# EAGLE board mainboard (EAGLE 6.5.0)
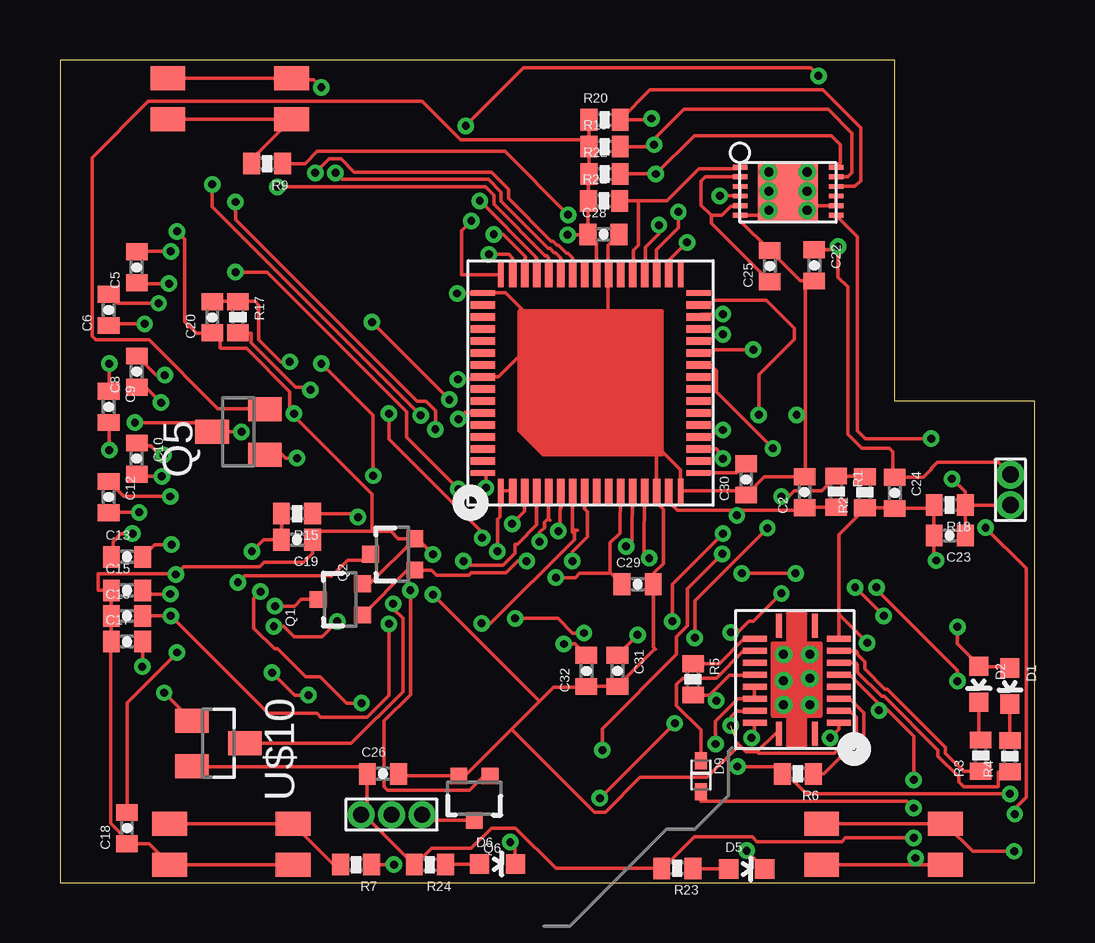
[diagram p0: board, top side]
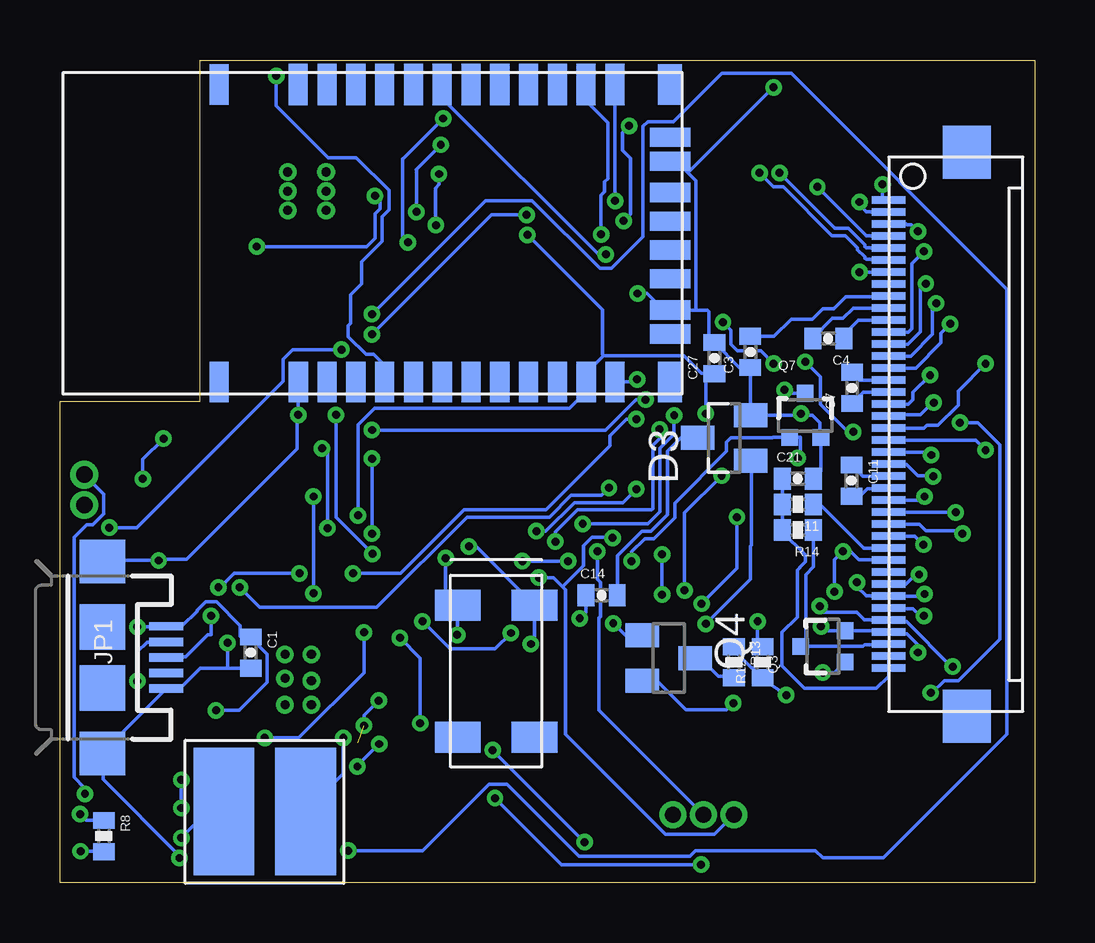
[diagram p1: board, bottom side, seen from below]

Size 40.64 x 34.29 mm. Coordinates in mm from the lower left corner, seen from the top.
Outline: 0,0 40.64,0 40.64,20.07 34.8,20.07 34.8,34.29 0,34.29 0,0
Copper layers (1*16): Top 0.035mm / dielectric 1.5mm / Bottom 0.035mm
Design rules "default *": minimum track width 6mil, minimum drill 13mil, track to track 6mil, track to pad 6mil, pad to pad 6mil, via to via 6mil, smd to smd 6mil, copper to edge 10mil, drill to drill 8mil, minimum pad ring 7mil, minimum via ring 7mil, stop-mask expansion 4mil, vias tented up to drill 0mil, thermal gap 10mil

## Footprints (pad centres in the part's own frame; a part is rotated, then mirrored left to right if it is on the bottom)
0402-CAP = smd 0.7 x 0.9: 1 -0.65,0; 2 0.65,0
LED-0603 = smd 0.8 x 0.8: A 0,-0.75; C 0,0.75
SOT23 = smd 1 x 1.4: 1 -0.95,-1.1; 2 0.95,-1.1; 3 0,1.1
SOD523 = smd 0.7 x 0.5: A 0.7,0; C -0.6,0
USB-MICROB = smd 0.35 x 1.4: D+ 0,2.65; D- -0.65,2.65; GND 1.3,2.65; ID 0.65,2.65; VBUS -1.3,2.65 | smd 1.8 x 1.9: MT1 -4,0; MT2 4,0 | smd 1.9 x 1.9: P$1 -1.27,0; P$2 1.27,0
ASPI_0428S-100M-T = smd 5.309 x 2.54: 1 0,0; 2 0,3.404
SOT323 = smd 0.7 x 0.7: 1 -0.65,-0.925; 2 0.65,-0.925; 3 0,0.925
0402-RES = smd 0.7 x 0.9: 1 -0.65,0; 2 0.65,0
VQFN_RGC_64PIN = smd 1.016 x 0.229: 1 0,8.25; 16 0,0.75; 33 9,0.75; 48 9,8.25 | smd 1.016 x 0.305: 2 0,7.75; 3 0,7.25; 4 0,6.75; 5 0,6.25; 6 0,5.75; 7 0,5.25; 8 0,4.75; 9 0,4.25; 10 0,3.75; 11 0,3.25; 12 0,2.75; 13 0,2.25; 14 0,1.75; 15 0,1.25; 34 9,1.25; 35 9,1.75; 36 9,2.25; 37 9,2.75; 38 9,3.25; 39 9,3.75; 40 9,4.25; 41 9,4.75; 42 9,5.25; 43 9,5.75; 44 9,6.25; 45 9,6.75; 46 9,7.25; 47 9,7.75 | smd 0.229 x 1.016: 17 0.75,0; 32 8.25,0; 49 8.25,9; 64 0.75,9 | smd 0.305 x 1.016: 18 1.25,0; 19 1.75,0; 20 2.25,0; 21 2.75,0; 22 3.25,0; 23 3.75,0; 24 4.25,0; 25 4.75,0; 26 5.25,0; 27 5.75,0; 28 6.25,0; 29 6.75,0; 30 7.25,0; 31 7.75,0; 50 7.75,9; 51 7.25,9; 52 6.75,9; 53 6.25,9; 54 5.75,9; 55 5.25,9; 56 4.75,9; 57 4.25,9; 58 3.75,9; 59 3.25,9; 60 2.75,9; 61 2.25,9; 62 1.75,9; 63 1.25,9
RN-42 = smd 1.7 x 0.8: 1 0.5,16; 2 0.5,14.8; 3 0.5,13.6; 4 0.5,12.4; 5 0.5,11.2; 6 0.5,10; 7 0.5,8.8; 8 0.5,7.6; 9 0.5,6.4; 10 0.5,5.2; 11 0.5,4; 12 0.5,2.8; 13 12.9,2.8; 14 12.9,4; 15 12.9,5.2; 16 12.9,6.4; 17 12.9,7.6; 18 12.9,8.8; 19 12.9,10; 20 12.9,11.2; 21 12.9,12.4; 22 12.9,13.6; 23 12.9,14.8; 24 12.9,16; P$35 0.5,19.3; P$36 12.9,19.3 | smd 0.8 x 1.7: 28 9.7,0.5; 29 3.5,0.5; 30 10.7,0.5; 31 8.4,0.5; 32 7.2,0.5; 33 6,0.5; 34 4.8,0.5; 35 2.5,0.5 | smd 1.7 x 1: P$33 0.5,0.5; P$34 12.9,0.5
VQFN_RHL_20PIN = smd 1 x 0.25: 1 0,1; 10 4.5,1; 11 4.5,2.5; 20 0,2.5 | smd 0.25 x 1: 2 0.45,0; 3 0.95,0; 4 1.45,0; 5 1.95,0; 6 2.45,0; 7 2.95,0; 8 3.45,0; 9 3.95,0; 12 3.95,3.5; 13 3.45,3.5; 14 2.95,3.5; 15 2.45,3.5; 16 1.95,3.5; 17 1.45,3.5; 18 0.95,3.5; 19 0.45,3.5 | drill 0.381: P$21 1.2,2.3; P$22 1.2,1.2; P$23 2.3,1.2; P$24 2.2,2.3; P$25 3.3,2.3; P$26 3.3,1.2
EVQ-PUK02K = smd 1.45 x 1: 1 5.15,1.7; 2 5.15,0; 3 0,1.7; 4 0,0
FH12-40S-0.5SH = smd 0.31 x 1.4: 1 0,0; 2 0.5,0; 3 1,0; 4 1.5,0; 5 2,0; 6 2.5,0; 7 3,0; 8 3.5,0; 9 4,0; 10 4.5,0; 11 5,0; 12 5.5,0; 13 6,0; 14 6.5,0; 15 7,0; 16 7.5,0; 17 8,0; 18 8.5,0; 19 9,0; 20 9.5,0; 21 10,0; 22 10.5,0; 23 11,0; 24 11.5,0; 25 12,0; 26 12.5,0; 27 13,0; 28 13.5,0; 29 14,0; 30 14.5,0; 31 15,0; 32 15.5,0; 33 16,0; 34 16.5,0; 35 17,0; 36 17.5,0; 37 18,0; 38 18.5,0; 39 19,0; 40 19.5,0 | smd 2.2 x 2: G@0 -2,3.25; G@1 21.5,3.25
SON_DRZ_12PIN = smd 0.2 x 0.6: 1 0.2,0; 2 0.6,0; 3 1,0; 4 1.4,0; 5 1.8,0; 6 2.2,0; 7 2.2,4; 8 1.8,4; 9 1.4,4; 10 1,4; 11 0.6,4; 12 0.2,4 | smd 2.5 x 2.5: 13 1.25,2 | drill 0.381: P$15 0.4,2.8; P$16 1.2,2.8; P$17 2,2.8; P$18 2,1.2; P$19 1.2,1.2; P$20 0.4,1.2
HEADER_2PIN_50MIL = drill 0.686 pad 1.016: 1 1.27,1.27; 2 1.27,2.54
HEADER_3PIN_50MIL = drill 0.66 pad 1.016: 1 1.27,1.27; 2 1.27,2.54; 3 1.27,3.81
ECS-327-12.5-17X-C-TR = smd 1.3 x 1.9: 1 1.25,0.3; 2 6.75,0.3; 3 6.75,3.5; 4 1.25,3.5

## Placement (x,y rotation side)
C1  0.1uF  [0402-CAP]  32.69,9.6 270 bottom
C2  10uF  [0402-CAP]  31.04,16.28 90 top
C3  [0402-CAP]  11.86,22.12 90 bottom
C4  [0402-CAP]  8.61,22.68 180 bottom
C5  [0402-CAP]  3.2,25.65 90 top
C6  [0402-CAP]  2.03,23.88 90 top
C7  [0402-CAP]  7.62,20.62 90 bottom
C8  [0402-CAP]  3.2,21.31 90 top
C9  [0402-CAP]  2.03,19.84 270 top
C10  [0402-CAP]  3.2,17.68 270 top
C11  [0402-CAP]  7.65,16.76 270 bottom
C12  [0402-CAP]  2.03,16.08 270 top
C13  [0402-CAP]  2.79,13.59 0 top
C14  [0402-CAP]  18.06,11.99 0 bottom
C15  [0402-CAP]  2.79,12.19 0 top
C16  [0402-CAP]  2.79,11.13 0 top
C17  [0402-CAP]  2.79,10.06 0 top
C18  [0402-CAP]  2.79,2.29 90 top
C19  [0402-CAP]  9.88,14.3 180 top
C20  [0402-CAP]  6.35,23.57 90 top
C21  [0402-CAP]  9.88,16.84 0 bottom
C22  0.1uF  [0402-CAP]  31.45,25.73 270 top
C23  0.1uF  [0402-CAP]  37.08,14.48 180 top
C24  0.1uF  [0402-CAP]  34.8,16.26 270 top
C25  0.47uF  [0402-CAP]  29.59,25.7 90 top
C26  [0402-CAP]  13.46,4.55 0 top
C27  0.1uF  [0402-CAP]  13.36,21.87 90 bottom
C28  0.1uF  [0402-CAP]  22.66,27.03 0 top
C29  0.1uF  [0402-CAP]  24.08,12.45 0 top
C30  0.47uF  [0402-CAP]  28.6,16.81 90 top
C31  12.5pF  [0402-CAP]  23.24,8.84 270 top
C32  12.5pF  [0402-CAP]  21.95,8.84 90 top
D1  BLUE  [LED-0603]  39.6,8.2 180 top
D2  BLUE  [LED-0603]  38.3,8.28 180 top
D3  BAT54S  [SOT23]  12.95,18.54 90 bottom
D5  BLUE  [LED-0603]  28.63,0.58 270 top
D6  BLUE  [LED-0603]  18.24,0.79 270 top
D9  [SOD523]  26.72,4.5 270 top
JP1  USB-MICROB  [USB-MICROB]  38.86,9.4 270 bottom
L1  10uH  [ASPI_0428S-100M-T]  30.4,2.97 90 bottom
Q1  MOSFET-NCHANNEL2N7002PW  [SOT323]  11.68,11.81 90 top
Q2  MOSFET-NCHANNEL2N7002PW  [SOT323]  13.87,13.69 90 top
Q3  MOSFET-NCHANNEL2N7002PW  [SOT323]  8.84,9.86 90 bottom
Q4  BSS84  [SOT23]  15.27,9.37 270 bottom
Q5  BSS84  [SOT23]  7.44,18.8 90 top
Q6  MOSFET-NCHANNEL2N7002PW  [SOT323]  17.27,3.53 180 top
Q7  MOSFET-NCHANNEL2N7002PW  [SOT323]  9.58,19.48 0 bottom
R1  56K  [0402-RES]  32.36,16.31 270 top
R2  10K  [0402-RES]  33.55,16.28 90 top
R3  1.5K  [0402-RES]  38.38,5.31 90 top
R4  1.5K  [0402-RES]  39.6,5.28 90 top
R5  1.6K  [0402-RES]  26.39,8.48 270 top
R6  10K  [0402-RES]  30.76,4.55 180 top
R7  10K  [0402-RES]  12.34,0.76 180 top
R8  10K  [0402-RES]  38.81,1.96 270 bottom
R9  10K  [0402-RES]  8.64,29.97 180 top
R11  [0402-RES]  9.88,15.77 180 bottom
R12  [0402-RES]  11.35,9.19 90 bottom
R13  [0402-RES]  12.55,9.19 270 bottom
R14  [0402-RES]  9.88,14.71 180 bottom
R15  [0402-RES]  9.88,15.39 180 top
R17  [0402-RES]  7.42,23.57 270 top
R18  0.01  [0402-RES]  37.08,15.75 180 top
R19  10K  [0402-RES]  22.71,30.68 0 top
R20  10K  [0402-RES]  22.71,31.8 0 top
R21  1.8M  [0402-RES]  22.68,28.42 0 top
R22  10K  [0402-RES]  22.71,29.54 0 top
R23  80  [0402-RES]  25.73,0.61 180 top
R24  80  [0402-RES]  15.42,0.76 180 top
U$1  MSP430F5528  [VQFN_RGC_64PIN]  26.62,16.33 90 top
U$2  RN-42  [RN-42]  14.71,20.37 90 bottom
U$3  BQ25010  [VQFN_RHL_20PIN]  32.46,6.22 90 top
U$4  RA_TAC_BUTTON"EVQPUK"  [EVQ-PUK02K]  4.57,0.76 0 top
U$5  RA_TAC_BUTTON"EVQPUK"  [EVQ-PUK02K]  31.75,0.76 0 top
U$6  RA_TAC_BUTTON"EVQPUK"  [EVQ-PUK02K]  9.65,33.53 180 top
U$8  FH12-40S-0.5SH  [FH12-40S-0.5SH]  6.1,28.45 270 bottom
U$9  BQ27410  [SON_DRZ_12PIN]  28.35,30.02 270 top
U$10  DMG2305UX  [SOT23]  6.6,5.82 270 top
U$11  HEADER_2PIN_50MIL  [HEADER_2PIN_50MIL]  40.89,18.29 180 top
U$12  HEADER_3PIN_50MIL  [HEADER_3PIN_50MIL]  16.36,1.57 90 top
X1  CRYSTAL"32.768"  [ECS-327-12.5-17X-C-TR]  24.36,12.83 270 bottom

## Library data of the parts
C1-C32 = SparkFun-Capacitors
D1 D2 D5 D6 = SparkFun-LED; PROD_ID: DIO-08575
D3 = diode
D9 = SparkFun-DiscreteSemi
JP1 = SparkFun-Connectors; PROD_ID: CONN-09505
L1 U$1-U$3 U$8-U$12 X1 = TuansLib
Q1-Q3 Q6 Q7 = SparkFun-DiscreteSemi; PROD_ID: TRANS-11151
Q4 Q5 = transistor-small-signal
R1-R9 R11-R15 R17-R24 = SparkFun-Passives
U$4-U$6 = TuansLib; PART#: EVQ-PUK02K

## Nets
BATT_PWR: C22.1 C24.1 R6.2 U$3.16 U$3.17 U$9.3 U$9.4 U$11.1
BORDER: Q3.3 R14.1 U$8.38
BT_BAUD: U$1.48 U$2.4
BT_CONN: U$1.47 U$2.19
BTN_0: R7.1 U$1.26
BTN_1: R8.1 U$1.27
BTN_2: R9.1 U$1.28
BTN_3: U$1.29
EPD_BORDER: Q4.1 U$1.7
EPD_BUSY: U$1.5 U$8.2
EPD_CS: U$1.3 U$8.1
EPD_DISCHARGE: Q1.1 Q2.1 U$1.8
EPD_PANEL: Q5.1 Q7.1 U$1.4
EPD_PWM: C14.1 U$1.19
EPD_RST: U$1.6 U$8.7
GND: C1.2 C2.2 C3.1 C15.1 C16.1 C17.1 C18.1 C19.1 C20.1 C21.2 C22.2 C23.2 C24.2 C25.2 C26.2 C27.2 C28.2 C29.2 C30.1 C31.2 C32.1 D3.2 JP1.GND JP1.MT1 JP1.MT2 Q1.2 Q2.2 Q6.2 Q7.2 R2.1 R5.2 R18.2 U$1.14 U$1.16 U$1.39 U$1.49 U$1.56 U$2.1 U$2.12 U$2.28 U$2.29 U$3.3 U$3.9 U$3.15 U$3.18 U$3.20 U$4.2 U$4.4 U$5.2 U$5.4 U$6.2 U$6.4 U$8.3 U$8.33 U$9.6 U$9.8 U$9.9 U$9.13 U$9.P$15 U$9.P$16 U$9.P$17 U$9.P$18 U$9.P$19 U$9.P$20
LED_0: D5.C U$1.30
LED_1: D6.C U$1.31
LED_2: U$1.32
LED_3: U$1.33
N$1: R5.1 U$3.12
N$2: D1.C R4.2
N$3: D9.C U$3.13
N$4: D2.C R3.2
N$5: R1.1 R2.2 U$3.2
N$6: L1.1 U$3.19
N$7: C30.2 U$1.17
N$8: Q4.3 R13.2
N$9: C14.2 D3.3
N$10: R4.1 U$3.7
N$11: R3.1 U$3.8
N$12: R6.1 U$3.4
N$13: R7.2 U$4.1 U$4.3
N$14: R8.2 U$5.1 U$5.3
N$15: R9.2 U$6.1 U$6.3
N$19: Q6.3 U$12.1
N$26: C4.2 U$8.10
N$27: C4.1 U$8.11
N$28: C5.2 U$8.12
N$29: C5.1 U$8.13
N$30: C6.2 U$8.14
N$31: C6.1 U$8.15
N$32: C7.2 U$8.16
N$33: C7.1 U$8.17
N$34: C8.2 U$8.18
N$35: C8.1 U$8.19
N$36: C9.1 U$8.20
N$37: C9.2 U$8.21
N$38: C10.1 U$8.22
N$39: C10.2 U$8.23
N$40: C11.1 U$8.24
N$41: C11.2 U$8.25
N$42: C12.1 U$8.26
N$43: C12.2 U$8.27
N$44: C13.1 U$8.28
N$45: C13.2 U$8.29
N$46: C3.2 U$8.9
N$47: R15.1 U$10.3
N$48: D5.A R23.1
N$49: Q3.1 R12.1 R13.1
N$50: C20.2 Q5.3 R17.1 U$10.1
N$51: D6.A R24.1
N$52: Q7.3 R17.2
PM_BIN: R21.2 U$1.37 U$9.1
PM_GPOUT: R22.2 U$1.36 U$9.12
PM_SCL: R19.2 U$1.35 U$9.11
PM_SDA: R20.2 U$1.34 U$9.10
PM_SRP: C23.1 R18.1 U$9.7 U$11.2
SENSOR_DATA: U$1.1 U$1.2 U$12.2
SENSOR_EN: Q6.1 U$1.20
SPI_CLK: U$1.44 U$8.4
SPI_MISO: U$1.43 U$8.6
SPI_MOSI: U$1.42 U$8.5
SPYBY_RST: JP1.D+ U$1.64
SPYBY_TEST: JP1.D- U$1.59
UART_RX: U$1.46 U$2.14
UART_TX: U$1.45 U$2.13
VCC: C2.1 C26.1 C27.1 C28.1 C29.1 L1.2 Q5.2 R1.2 R19.1 R20.1 R21.1 R22.1 R23.2 R24.2 U$1.11 U$1.15 U$1.40 U$2.11 U$10.2 U$12.3
VCC_R: C25.1 U$9.2 U$9.5
VCC_T: C19.2 Q4.2 R15.2 U$8.31 U$8.32
VCOM: C21.1 R11.2 R14.2 U$8.39 U$8.40
VCOM_DRIVER: R11.1 U$8.30
VDH: C17.2 Q1.3 U$8.36
VDL: C18.2 Q3.2 R12.2 U$8.37
VGH: C15.2 Q2.3 U$8.34
VGL: C16.2 D3.1 U$8.35
VUSB: C1.1 D1.A D2.A D9.A JP1.VBUS U$3.6
XIN: C32.2 U$1.12 X1.4
XOUT: C31.1 U$1.13 X1.1

## Tracks (layer width: path | path; a pad name or v marks a point on that pad's centre or on a via)
BATT_PWR  (via drill 0.33, 0.33 pad 0.51)
  Top 0.152: U$11.1 39.12,17.53 36.58,17.53 36.32,17.27 36.32,17.25 35.98,16.91 C24.1 34.72,16.98 34.72,17.96 34.57,18.11 33.43,18.11 32.84,18.69 32.84,24.84 32.44,25.25 v32.44,26.52 32.3,26.38 C22.1 | U$9.3 U$9.4 v27.51,28.63 | U$3.16 28.96,8.15 28.96,7.7 U$3.17 28.91,7.67 28.27,7.67 27.33,6.73 v27.33,5.79 | v39.6,3.71 31.11,3.71 30.28,4.55 R6.2 30.1,4.6 30.1,4.85 v28.25,4.85
  Bottom 0.152: v27.51,28.63 27.3,28.42 27.3,28.09 27.51,27.89 27.51,26.87 27.86,26.52 v32.44,26.52 | v39.6,3.71 39.6,3.94 40.06,4.39 40.06,14.4 39.52,14.94 39.27,14.94 38.81,15.39 38.81,16.2 U$11.1 | v27.33,5.79 28.25,4.88 v28.25,4.85
BORDER
  Bottom 0.152: U$8.38 6.11,9.93 7.09,9.93 7.16,9.86 Q3.3 9.55,10.07 9.55,12.85 9.23,13.17 R14.1
BT_BAUD  (via drill 0.33 pad 0.51)
  Top 0.152: U$1.48 18.39,25.35 18.36,25.38 18.34,25.35 16.74,25.35 16.74,27.18 v17.14,27.58 | v16.92,31.55 19.33,33.96 31.29,33.96 v31.62,33.63
  Bottom 0.152: v17.14,27.58 16.87,27.86 16.87,30.2 17.2,30.53 17.2,31.27 v16.92,31.55 | v31.62,33.63 31.62,32.38 29.46,30.23 28.3,30.23 26.92,28.85 26.92,28.04 27.2,27.76 27.2,26.75 28.07,25.88 28.07,24.97 28.52,24.51 28.52,23.32 28.63,23.22 28.63,22.76 27.89,22.02 27.56,22.02 27.1,21.57 U$2.4
BT_CONN  (via drill 0.33 pad 0.51)
  Top 0.152: v17.88,26.19 18.72,26.19 18.87,26.04 18.87,25.35 U$1.47
  Bottom 0.152: v17.88,26.19 18.19,26.19 24.54,32.54 24.69,32.54 24.71,32.56 24.71,33.25 U$2.19
BTN_0  (via drill 0.33)
  Top 0.152: v13.92,0.76 R7.1 | v25.63,6.66 v22.5,3.53 | v26.47,10.21 26.47,11.76 v29.49,14.78 | v29.72,18.11 27.36,20.47 27.36,21.34 27.13,21.57 26.62,21.57 U$1.26
  Bottom 0.152: v13.92,0.76 19.74,0.76 v22.5,3.53 | v25.63,6.66 25.63,9.37 v26.47,10.21 | v29.49,14.78 29.49,17.88 v29.72,18.11
BTN_1  (via drill 0.33)
  Top 0.152: v39.8,2.87 39.8,3.1 40.28,3.58 40.28,13.11 v38.58,14.81 | v28.91,22.23 27.25,22.23 27.13,22.1 26.62,22.1 U$1.27
  Bottom 0.152: v39.8,2.87 39.55,2.62 R8.1 | v38.58,14.81 37.44,14.81 31.34,20.9 31.34,21.82 30.94,22.23 v28.91,22.23
BTN_2  (via drill 0.33)
  Top 0.152: R9.1 10.21,29.97 10.72,30.48 18.54,30.48 v21.18,27.84 | v27.64,22.86 27.38,22.86 27.13,22.61 26.62,22.61 U$1.28
  Bottom 0.152: v21.18,27.84 22.66,27.84 v27.64,22.86
EPD_BORDER  (via drill 0.33 pad 0.51)
  Top 0.152: 21.36,14.61 21.36,14.71 | 21.36,14.71 U$1.7 | 21.44,14.71 21.36,14.71 | 21.44,14.71 21.57,14.71 | 21.44,14.71 21.44,14.3 17.96,10.82 v17.58,10.82
  Bottom 0.152: v17.58,10.82 17.07,10.31 16.38,10.31 Q4.1
EPD_BUSY  (via drill 0.33 pad 0.51)
  Top 0.152: U$1.5 20.37,15.16 | 20.37,15.16 20.42,15.11 | v19.99,14.22 19.99,14.61 20.19,14.81 20.19,15.04 20.3,15.14 20.37,15.16 | v15.65,18.9 15.65,19.68 15.27,20.07 14.88,20.07 7.32,27.64 v7.32,28.37
  Bottom 0.152: 7.44,28.5 7.44,28.37 7.39,28.32 | 7.39,28.32 7.04,27.96 6.83,27.96 6.81,27.94 U$8.2 | v19.99,14.22 19.99,14.63 19.07,15.54 15.98,15.54 15.93,15.6 15.93,18.24 15.65,18.52 v15.65,18.9 | v7.32,28.37 7.34,28.37 7.39,28.32
EPD_CS  (via drill 0.33 pad 0.51)
  Top 0.152: U$1.3 19.37,15.48 v18.85,14.96 | v6.35,29.11 6.35,28.17 v15.04,19.48
  Bottom 0.152: U$8.1 6.35,28.45 v6.35,29.11 6.35,29.23 | v15.04,19.48 15.04,18.69 15.62,18.11 15.62,15.47 16.13,14.96 v18.85,14.96
EPD_DISCHARGE  (via drill 0.33 pad 0.51)
  Top 0.152: Q1.1 14.49,13.04 Q2.1 14.86,13.03 15.49,13.03 15.7,12.83 17.04,12.83 17.14,12.93 18.59,12.93 19.07,13.41 v19.46,13.41 | U$1.8 21.87,15.6 22,15.47 22,14.43 21.36,13.79 v21.36,13.41 | U$1.8
  Bottom 0.152: v19.46,13.41 v21.36,13.41
EPD_PANEL  (via drill 0.33 pad 0.51)
  Top 0.152: v9.88,17.7 9.4,17.7 9.25,17.86 8.56,17.86 Q5.1 | U$1.4 19.87,14.92 19.07,14.12 18.97,14.12 18.97,13.74 18.47,13.23 16.99,13.23 v16.82,13.41
  Bottom 0.152: v9.88,17.7 9.78,17.8 9.78,18.57 10.21,18.57 Q7.1 10.29,18.57 10.92,18.57 10.95,18.54 12.68,18.54 12.85,18.36 12.85,17.98 15.01,15.82 15.01,15.21 15.88,14.35 16.26,14.35 16.82,13.79 v16.82,13.41
EPD_PWM  (via drill 0.33 pad 0.51)
  Top 0.152: U$1.19 27.36,18.09 27.46,17.98 27.46,17.8 27.51,17.8 v27.64,17.68 | v27.64,14.55 25.53,12.45 v25.53,10.9 | v21.84,10.41 21.36,10.41 20.75,11.02 v18.97,11.02
  Bottom 0.152: v27.64,14.55 v27.64,17.68 | v25.53,10.9 24.38,9.75 22.5,9.75 v21.84,10.41 | v18.97,11.02 18.72,11.28 C14.1
EPD_RST  (via drill 0.33 pad 0.51)
  Top 0.152: U$1.6 20.88,15.62 20.85,15.6 20.85,14.73 v20.78,14.66 | v16.61,16.41 14.45,18.57 14.45,19.63 8.64,25.45 v7.32,25.45
  Bottom 0.152: v20.78,14.66 20.4,14.66 19.2,15.85 17.17,15.85 v16.61,16.41 | v7.32,25.45 U$8.7
GND  (via drill 0.33, 0.33 pad 0.51)  (1 unrouted)
  Top 0.152: U$6.2 U$6.4 9.7,33.48 10.57,33.48 v10.9,33.15 | Q1.2 12.91,12.46 Q2.2 | v36.52,13.44 36.43,13.53 C23.2 R18.2 36.29,15.61 C24.2 34.77,15.63 R2.1 33.53,15.57 32.46,14.5 32.46,11.15 | U$9.P$20 U$9.P$19 | U$9.P$19 U$9.P$18 29.35,27.82 U$9.6 28.35,27.6 C25.2 29.64,26.31 30.86,25.09 31.45,25.09 C22.2 31.06,25.04 31.06,19.51 | U$9.P$19 U$9.P$16 | U$9.13 31.1,28.77 U$9.P$16 | U$9.P$16 U$9.P$15 | U$9.P$16 U$9.P$17 31.35,28.22 U$9.8 U$9.9 | 22.85,25.35 U$1.39 | 22.85,25.35 22.85,26.57 C28.2 | 13.01,14.66 13.79,14.66 14.1,14.35 14.71,14.35 Q2.2 | 13.01,14.66 10.54,14.66 10.54,14.35 C19.1 10.53,13.73 10.16,13.36 8.51,13.36 8.33,13.18 5.16,13.18 v4.83,12.85 4.83,12.88 1.6,12.88 1.6,12.19 C15.1 C16.1 C17.1 2.11,10.01 2.11,2.49 2.77,1.83 2.77,1.7 C18.1 2.79,1.63 3.71,1.63 U$4.4 U$4.2 | v4.88,27.15 5.21,26.82 5.21,23.39 5.69,22.91 C20.1 6.4,22.91 6.68,22.91 6.68,22.3 6.71,22.28 7.77,22.28 9.58,20.47 9.58,19.66 9.65,19.66 v9.75,19.56 9.7,19.51 13.01,16.2 13.01,14.66 | 22.85,25.35 22.85,23.23 22.81,23.19 22.71,23.29 19.86,23.29 | 19.86,23.29 18.57,24.58 U$1.49 17.55,24.56 v16.56,24.56 | 19.86,23.29 19.86,22.66 18.29,21.08 U$1.56 17.55,21.06 17.48,20.98 v16.59,20.98 | R5.2 26.44,7.82 27.08,7.82 27.1,7.85 | U$3.15 27.91,8.66 27.1,7.85 | C26.2 14.12,4.55 14.2,4.47 Q6.2 16.69,4.47 16.89,4.47 18.82,6.4 | U$5.2 35.66,0.76 | 35.66,0.76 U$5.4 | v35.66,1.04 35.66,0.76 | 32.46,11.15 U$3.9 | 31.06,19.51 31.06,16.99 C2.2 31.04,16.92 29.36,16.92 28.65,16.2 C30.1 28.43,16.33 U$1.16 25.87,17.21 25.04,18.03 24.87,17.86 U$1.14 24.92,16.28 24.92,15.8 25.15,15.57 25.15,13.31 24.77,12.93 24.77,12.5 C29.2 24.73,9.81 24.82,9.73 24.78,9.73 C31.2 C32.1 21.89,8.15 20.57,8.15 19.99,7.57
  Top 0.152: 31.06,19.51 v30.71,19.51 | U$3.20 29.82,6.22 29.06,5.46 | 29.06,5.46 28.6,5.46 28.32,5.74 | 28.22,5.84 28.32,5.74 | U$3.3 32.94,7.16 33.2,6.91 33.2,6.33 32.28,5.41 29.11,5.41 29.06,5.46 | 19.99,7.57 18.82,6.4 | v33.66,10.01 32.51,11.15 32.46,11.15 | 28.32,5.74 26.98,4.39 24.18,4.39 22.73,2.95 22.28,2.95 18.82,6.4 | v15.54,12.01 19.99,7.57 | v15.54,13.69 14.86,14.38 Q2.2 | v27.96,6.55 27.96,6.93 28.19,7.16 U$3.18 | 27.1,7.85 v27.36,7.59
  Bottom 0.152: JP1.MT1 38.82,13.44 v36.52,13.44 36.47,13.49 35.36,13.49 30.76,18.09 30.76,19.46 v30.71,19.51 30.71,20.85 U$2.1 | C21.2 8.93,17.14 Q7.2 8.97,18.6 8.97,19.18 9.28,19.49 9.75,19.49 | 9.75,19.49 D3.2 C3.1 12.31,21.47 C27.2 13.59,22.75 13.59,23.8 13.66,23.87 14.12,23.87 | 14.12,23.87 U$2.29 15.27,23.9 15.52,23.9 16.18,24.56 v16.56,24.56 | v4.88,27.15 5.16,27.43 5.36,27.43 5.38,27.46 U$8.3 | v9.75,19.56 9.75,19.49 | v4.83,12.85 4.98,12.85 5.38,12.45 5.39,12.45 U$8.33 | v16.59,20.98 16.69,20.88 U$2.12 | 14.45,29.59 14.12,29.26 14.12,23.87 | 14.45,29.59 14.91,30.05 15.19,30.05 U$2.28 | 14.45,29.59 v10.9,33.15 | v35.66,1.04 35.66,1.14 38.84,4.32 38.84,5.33 JP1.MT2 38.86,5.45 JP1.GND 36.14,8.13 35.61,8.13 34.8,8.94 33.66,8.94 | 33.66,8.94 C1.2 | v33.66,10.01 33.66,8.94 | v15.54,13.69 v15.54,12.01 | v27.96,6.55 27.96,6.99 v27.36,7.59
  cutout Bottom: 0.25,34.04 0.3,0.25 40.36,0.25 40.36,19.81 34.42,19.81 34.42,34.04
LED_0  (via drill 0.33)
  Top 0.152: v28.63,1.35 28.63,1.32 29.36,0.58 D5.C | v27.64,23.7 26.72,23.7 26.62,23.6 U$1.30
  Bottom 0.152: v28.63,1.35 25.53,1.35 22.76,4.12 22,4.12 19,1.12 14.38,1.12 14.15,1.35 9.14,1.35 8.84,1.04 6.33,1.04 1.17,6.2 1.17,24.74 10.16,33.73 13.06,33.73 15.06,31.73 16.13,31.73 16.33,31.52 16.33,26.92 17.65,25.6 18.14,25.6 20.95,28.42 22.91,28.42 v27.64,23.7
LED_1  (via drill 0.33)
  Top 0.152: v18.77,1.7 18.97,1.5 18.97,0.79 D6.C | v22.61,5.54 22.61,6.43 25.7,9.53 25.7,10.26 26.16,10.72 26.16,12.27 v27.61,13.72 | v29.13,19.51 29.13,21.18 30.61,22.66 30.61,23.11 29.44,24.28 27.28,24.28 27.1,24.11 26.62,24.11 U$1.31
  Bottom 0.152: v22.61,5.54 v18.77,1.7 | v27.61,13.72 29.13,15.24 v29.13,19.51
N$1
  Top 0.152: R5.1 26.39,9.14 27.48,9.14 28.5,10.16 U$3.12
N$2
  Top 0.152: R4.2 D1.C
N$3
  Top 0.152: D9.C 26.72,6.38 25.7,7.39 25.7,8.28 25.96,8.53 27.36,8.53 28.47,9.65 28.96,9.65 U$3.13
N$4
  Top 0.152: D2.C 38.3,6.04 R3.2
N$5  (via drill 0.33)
  Top 0.152: R2.2 33.55,16.94 32.36,16.94 R1.1 32.31,16.89 31.75,16.33 30.61,16.33 30.38,16.1 v30.07,16.1 | U$3.2 32.46,6.4 v32.11,6.04 | v27.96,10.44 28.27,10.44 28.73,10.9 28.91,10.9 v30.07,12.06
  Bottom 0.152: v32.11,6.04 30.68,6.04 27.96,8.76 v27.96,10.44 | v30.07,16.1 v30.07,12.06
N$6  (via drill 0.33)
  Top 0.152: v28.83,6.04 28.96,6.17 28.96,6.66 U$3.19
  Bottom 0.152: v28.83,6.04 28.83,4.55 L1.1
N$7
  Top 0.152: C30.2 28.22,17.08 U$1.17
N$8
  Bottom 0.152: Q4.3 13.95,9.37 13.18,8.61 12.61,8.61 R13.2
N$9
  Bottom 0.152: D3.3 14.76,18.54 15.32,17.98 15.32,15.34 16,14.66 16.38,14.66 17.4,13.64 C14.2
N$10
  Top 0.152: R4.1 39.12,4.62 39.12,4.04 39.09,4.01 37.67,4.01 37.47,4.22 37.47,4.42 36.6,5.28 36.6,5.54 34.37,7.77 34.27,7.77 33.25,8.79 33.25,9.09 33.17,9.17 U$3.7
N$11
  Top 0.152: R3.1 38.38,4.65 37.67,4.65 36.91,5.41 36.91,5.66 34.49,8.08 34.39,8.08 33.55,8.91 33.55,9.22 33.25,9.53 33.25,9.6 33.17,9.68 U$3.8
N$12
  Top 0.152: R6.1 31.85,4.55 33.5,6.2 33.5,7.09 32.92,7.67 U$3.4
N$13
  Top 0.152: R7.2 11.4,0.76 9.73,2.44 U$4.1 9.65,2.46 U$4.3
N$14  (via drill 0.33)
  Top 0.152: U$5.3 36.83,2.46 U$5.1 36.96,2.41 38.05,1.32 v39.78,1.32
  Bottom 0.152: v39.78,1.32 R8.2
N$15
  Top 0.152: U$6.1 U$6.3 7.99,30.16 R9.2
N$19
  Top 0.152: U$12.1 15.32,2.62 Q6.3
N$26
  Bottom 0.152: U$8.10 7.57,23.95 8,23.52 8.43,23.52 9.26,22.69 C4.2
N$27
  Bottom 0.152: U$8.11 7.37,23.44 7.96,22.85 C4.1
N$28  (via drill 0.33 pad 0.51)
  Top 0.152: v4.62,26.31 3.21,26.31 C5.2
  Bottom 0.152: U$8.12 5.27,22.95 5.13,23.09 5.13,25.81 v4.62,26.31
N$29  (via drill 0.33 pad 0.51)
  Top 0.152: v4.55,24.97 3.24,24.97 C5.1
  Bottom 0.152: U$8.13 5.29,22.45 4.78,22.96 4.78,24.74 v4.55,24.97
N$30  (via drill 0.33 pad 0.51)
  Top 0.152: v4.12,24.16 2.4,24.16 C6.2
  Bottom 0.152: U$8.14 5.18,21.95 4.27,22.86 4.27,24 v4.12,24.16
N$31  (via drill 0.33 pad 0.51)
  Top 0.152: v3.53,23.29 2.1,23.29 C6.1
  Bottom 0.152: U$8.15 4.97,21.45 3.91,22.5 3.91,22.91 v3.53,23.29
N$32
  Bottom 0.152: U$8.16 7.29,20.95 C7.2
N$33
  Bottom 0.152: U$8.17 7.15,20.45 C7.1
N$34  (via drill 0.33 pad 0.51)
  Top 0.152: v4.37,21.16 4,21.16 C8.2
  Bottom 0.152: U$8.18 5.27,19.95 5.08,20.14 5.08,20.45 v4.37,21.16
N$35  (via drill 0.33 pad 0.51)
  Top 0.152: C8.1 3.57,20.66 v4.22,20.02
  Bottom 0.152: v4.22,20.02 4.27,20.02 4.78,19.51 6.04,19.51 U$8.19
N$36  (via drill 0.33 pad 0.51)
  Top 0.152: v2.06,21.64 2.06,20.51 C9.1
  Bottom 0.152: U$8.20 4.62,18.95 4.5,19.07 4.04,19.07 3.2,19.91 3.2,20.5 v2.06,21.64
N$37  (via drill 0.33 pad 0.51)
  Top 0.152: v2.06,18.03 2.06,19.16 C9.2
  Bottom 0.152: U$8.21 2.47,18.45 v2.06,18.03
N$38  (via drill 0.33 pad 0.51)
  Top 0.152: C10.1 3.32,18.21 3.79,18.21 4.17,17.83 v4.32,17.83 4.14,17.83
  Bottom 0.152: v4.32,17.83 4.43,17.95 U$8.22
N$39  (via drill 0.33 pad 0.51)
  Top 0.152: C10.2 3.29,16.94 v4.24,16.94
  Bottom 0.152: v4.24,16.94 4.27,16.97 4.88,16.97 5.36,17.45 U$8.23
N$40
  Bottom 0.152: U$8.24 7.18,16.95 C11.1
N$41
  Bottom 0.152: U$8.25 6.11,16.43 6.99,16.43 7.3,16.11 C11.2
N$42  (via drill 0.33 pad 0.51)
  Top 0.152: C12.1 2.66,16.1 v4.6,16.1
  Bottom 0.152: v4.6,16.1 4.75,15.95 U$8.26
N$43  (via drill 0.33 pad 0.51)
  Top 0.152: C12.2 2.05,15.44 v3.3,15.44
  Bottom 0.152: v3.3,15.44 v3.31,15.45 U$8.27
N$44  (via drill 0.33 pad 0.51)
  Top 0.152: C13.1 2.21,13.65 2.21,14.22 2.54,14.55 v3.02,14.55
  Bottom 0.152: v3.02,14.55 3.15,14.68 4.55,14.68 4.81,14.95 U$8.28
N$45  (via drill 0.33 pad 0.51)
  Top 0.152: C13.2 3.95,14.1 v4.65,14.1
  Bottom 0.152: v4.65,14.1 5,14.45 U$8.29
N$46
  Bottom 0.152: U$8.9 6.11,24.43 7.87,24.43 8.38,23.93 8.84,23.93 9.27,23.5 10.16,23.5 10.88,22.77 C3.2
N$47  (via drill 0.33)
  Top 0.152: R15.1 12.27,15.39 v12.42,15.24 | v13.89,11.63 13.89,11.43 14.3,11.02 14.3,7.98 12.14,5.82 U$10.3
  Bottom 0.152: v12.42,15.24 12.42,13.11 v13.89,11.63
N$48
  Top 0.152: D5.A 26.42,0.58 R23.1
N$49  (via drill 0.33 pad 0.51)
  Top 0.152: v10.36,7.82 9.78,7.82 v8.84,8.76
  Bottom 0.152: R13.1 12.55,9.7 11.81,8.97 11.78,8.97 R12.1 11.35,8.51 v10.36,7.82 | Q3.1 8.36,8.76 v8.84,8.76
N$50  (via drill 0.33, 0.33 pad 0.51)
  Top 0.152: C20.2 6.35,24.23 7.42,24.23 R17.1 7.47,24.23 8.13,24.23 8.28,24.08 8.28,22.63 9.2,21.72 v9.58,21.72 | v7.57,18.8 Q5.3 6.27,18.82 5.92,19.18 v3.12,19.18 | v4.34,7.92 5.49,6.78 U$10.1
  Bottom 0.152: v7.57,18.8 7.8,18.8 8.94,19.94 8.94,21.08 v9.58,21.72 | v4.34,7.92 4.29,7.92 3.79,8.43 3.2,8.43 1.47,10.16 1.47,18.26 2.39,19.18 v3.12,19.18
N$51
  Top 0.152: D6.A 16.1,0.79 R24.1
N$52  (via drill 0.33 pad 0.51)
  Top 0.152: R17.2 7.98,22.91 7.98,22.5 9.83,20.65 10.34,20.65 v10.44,20.55
  Bottom 0.152: v10.44,20.55 10.29,20.4 9.58,20.4 Q7.3
PM_BIN
  Top 0.152: U$9.1 28.29,29.77 26.64,29.77 25.3,28.42 24.11,28.42 | 24.11,28.42 R21.2 | U$1.37 23.9,25.36 23.9,26.36 24.11,26.57 24.11,28.42
PM_GPOUT  (via drill 0.33 pad 0.51)
  Top 0.152: U$9.12 32.54,30.01 32.54,30.76 32.16,31.14 26.44,31.14 v24.84,29.54 R22.2 | U$1.36 24.41,25.37 24.41,26.49 24.97,27.05 v24.97,27.41
  Bottom 0.152: v24.97,27.41 24.97,27.66 24.99,27.69 24.99,28.96 24.84,29.11 v24.84,29.54
PM_SCL  (via drill 0.33 pad 0.51)
  Top 0.152: U$9.11 32.85,29.42 33.02,29.59 33.02,31.24 32.03,32.23 26.01,32.23 24.65,30.87 | 24.65,30.87 24.46,30.68 R19.2 | 24.65,30.87 v24.77,30.76 | v25.78,27.96 25.78,27.3 24.87,26.39 U$1.35
  Bottom 0.152: v24.77,30.76 25.81,29.72 25.78,29.69 v25.78,27.96
PM_SDA  (via drill 0.33 pad 0.51)
  Top 0.152: U$9.10 33.14,29.02 33.38,29.26 33.38,31.47 31.8,33.05 24.6,33.05 R20.2 | R20.2 23.48,31.93 | v26.14,26.7 25.37,25.93 U$1.34 | v24.66,31.85 24.61,31.8 R20.2
  Bottom 0.152: v26.14,26.7 26.14,26.72 26.36,26.95 26.36,30.18 26.34,30.18 v24.66,31.85
PM_SRP  (via drill 0.33 pad 0.51)
  Top 0.152: R18.1 C23.1 | R18.1 U$11.2 | R18.1 37.73,16.29 v37.19,16.84 | v36.32,18.52 33.58,18.52 33.25,18.85 33.25,26.92 U$9.7
  Bottom 0.152: v37.19,16.84 37.19,17.65 v36.32,18.52
SENSOR_DATA  (via drill 0.33)
  Top 0.152: U$1.2 U$1.1 18.34,16.28 18.34,15.27 18.24,15.16 v18.24,13.82
  Bottom 0.152: v18.24,13.82 18.24,12.65 18.11,12.52 18.11,11.1 18.16,11.05 18.16,7.19 U$12.2
SENSOR_EN  (via drill 0.33)
  Top 0.152: v14.61,12.19 14.61,7.85 13.51,6.76 13.51,4.01 13.66,3.86 17.07,3.86 17.65,4.45 17.91,4.45 Q6.1 | v13.06,16.97 13.06,19.48 v10.9,21.64 | v16.23,20.14 v13.01,23.37 | v27.64,18.87 27.41,18.87 27.13,18.59 26.62,18.59 U$1.20
  Bottom 0.152: v14.61,12.19 14.61,15.42 v13.06,16.97 | v10.9,21.64 11.43,22.17 12.39,22.17 12.68,22.45 12.68,23.04 v13.01,23.37 | v16.23,20.14 16.64,20.14 17.91,18.87 v27.64,18.87
SPI_CLK  (via drill 0.33 pad 0.51)
  Top 0.152: U$1.44 20.37,25.35 20.37,26.06 20.3,26.14 20.22,26.14 18.09,28.27 18.09,28.65 17.73,29.01 v9.07,29.01
  Bottom 0.152: v9.07,29.01 7.04,26.98 6.83,26.98 6.81,26.95 U$8.4
SPI_MISO  (via drill 0.33 pad 0.51)
  Top 0.152: v11.48,29.59 11.76,29.31 17.86,29.31 18.39,28.78 18.39,28.4 20.34,26.44 20.42,26.44 20.6,26.26 20.65,26.26 20.88,26.04 20.88,25.35 U$1.43
  Bottom 0.152: v11.48,29.59 10.9,29.01 10.49,29.01 8.46,26.98 7.9,26.98 7.39,26.47 7.39,26.39 7.09,26.09 7.09,26.04 7.04,25.98 6.83,25.98 6.81,25.96 U$8.6
SPI_MOSI  (via drill 0.33 pad 0.51)
  Top 0.152: 21.36,25.35 U$1.42 21.36,25.43 21.36,26.06 21.18,26.24 21.11,26.24 20.78,26.57 20.73,26.57 20.55,26.75 20.47,26.75 18.69,28.52 18.69,28.91 17.98,29.62 12.27,29.62 11.71,30.18 11.23,30.18 v10.64,29.59
  Bottom 0.152: U$8.5 6.81,26.44 6.83,26.47 7.04,26.47 7.09,26.52 7.09,26.59 7.77,27.28 8.33,27.28 v10.64,29.59
SPYBY_RST  (via drill 0.33 pad 0.51)
  Top 0.152: v33.15,12.32 v34.34,11.12 | v17.75,16.46 17.75,17.09 17.63,17.09 U$1.64
  Bottom 0.152: JP1.D+ 35.51,9.4 35.48,9.42 35.41,9.42 34.49,10.34 34.34,10.34 v34.34,11.12 | v33.15,12.32 32.31,11.48 27.43,11.48 23.67,15.24 20.24,15.24 19.33,16.15 18.06,16.15 v17.75,16.46
SPYBY_TEST  (via drill 0.33 pad 0.51)
  Top 0.152: v34.04,12.32 34.04,12.24 37.41,8.87 v37.41,8.41 | v28.42,12.9 v30.66,12.9 | v16.61,19.33 16.89,19.61 16.92,19.58 17.6,19.58 U$1.59
  Bottom 0.152: v34.04,12.32 34.04,12.22 33.73,12.52 33.73,12.55 33.38,12.9 v30.66,12.9 | v37.41,8.41 37.41,9.63 37.01,10.03 36.93,10.03 36.91,10.06 JP1.D- | v28.42,12.9 26.44,12.9 23.8,15.54 20.37,15.54 17.7,18.21 17.7,18.64 17.02,19.33 v16.61,19.33
UART_RX  (via drill 0.33 pad 0.51)
  Top 0.152: v18.09,27.03 18.47,27.03 19.41,26.09 19.41,26.06 19.38,26.04 19.38,25.35 U$1.46
  Bottom 0.152: U$2.14 18.69,33.25 18.69,32.56 17.8,31.67 17.8,29.34 17.93,29.21 17.93,28.8 18.09,28.65 v18.09,27.03
UART_TX  (via drill 0.33 pad 0.51)
  Top 0.152: v17.5,28.42 19.86,26.06 19.86,25.35 U$1.45
  Bottom 0.152: v17.5,28.42 17.5,33.25 U$2.13
VCC  (via drill 0.33)
  Top 0.152: U$1.11 23.34,14.58 22.94,14.17 22.94,12.94 | 22.94,12.94 C29.1 | U$1.40 22.37,26.66 C28.1 | C28.1 22.01,28.4 R21.1 22.03,29.52 R22.1 R19.1 | R19.1 R20.1 | U$10.2 5.51,4.85 12.5,4.85 12.75,4.6 C26.1 12.8,3.1 U$12.3 12.65,2.87 14.76,0.76 R24.2 14.83,0.79 15.49,1.45 17.14,1.45 17.98,2.29 19,2.29 20.68,0.61 R23.2 25.15,0.64 26.44,1.93 28.85,1.93 29.06,1.73 32.59,1.73 32.74,1.88 v35.59,1.88 | v20.68,12.72 21.49,12.72 21.67,12.9 22.89,12.9 22.94,12.94 | R1.2 32.36,15.65 31.04,15.65 C2.1 30.99,15.6 30.91,15.52 28.22,15.52 | 28.22,15.52 25.73,15.52 25.38,15.88 U$1.15 | Q5.2 6.58,19.76 3.71,22.63 1.5,22.63 1.35,22.78 1.35,30.23 3.68,32.56 15.09,32.56 16.69,30.96 22,30.96 R19.1 | v21.16,27 21.95,27 C28.1 | v28.22,15.32 28.22,15.52 | v17.6,14.38 17.6,14.61 13.72,18.49 v13.72,19.56
  Bottom 0.152: v20.68,12.72 20.07,12.72 19.68,12.34 | 19.68,12.34 19.56,12.22 19.56,6.2 15.39,2.03 13.36,2.03 U$12.3 | L1.2 34.49,2.97 v35.59,1.88 | 17.98,21.97 14.63,21.97 13.89,21.23 13.36,21.23 C27.1 13.72,21.18 v13.72,19.56 | 17.98,21.97 18.69,21.26 18.69,20.88 U$2.11 18.75,20.8 18.75,20.45 19.41,19.79 27.53,19.79 28.22,19.1 v28.22,15.32 | v21.16,27 18.03,23.88 18.03,22.02 17.98,21.97 | 19.68,12.34 18.82,13.21 18.82,14.05 18.47,14.4 17.63,14.4 v17.6,14.38
VCC_R
  Top 0.152: U$9.5 28.32,28.19 27.96,28.19 27.58,27.81 27.15,27.81 | 27.15,27.81 26.72,28.25 26.72,29.23 26.91,29.42 U$9.2 | C25.1 27.15,27.49 27.15,27.81
VCC_T  (via drill 0.33 pad 0.51)
  Top 0.152: v8,13.82 8.48,14.3 C19.2 R15.2 | v12.57,7.49 11.94,7.49 10.85,8.59 10.24,8.59 9.07,9.75 8.94,9.75 8.08,10.62 8.08,11.86 v8.36,12.14
  Bottom 0.152: U$8.32 U$8.31 6.11,13.46 7.34,13.46 7.7,13.82 v8,13.82 8.36,13.46 v8.36,12.14 | Q4.2 15.76,8.42 14.55,7.21 12.85,7.21 v12.57,7.49
VCOM
  Bottom 0.152: U$8.39 U$8.40 6.1,8.61 6.6,8.1 9.6,8.1 10.57,9.07 10.54,9.09 10.54,10.44 9.91,11.07 9.91,13.03 9.8,13.13 9.8,13.16 9.58,13.39 9.58,13.66 10.53,14.62 R14.2 R11.2 C21.1
VCOM_DRIVER
  Bottom 0.152: R11.1 8.97,15.77 7.14,13.95 U$8.30
VDH  (via drill 0.33 pad 0.51)
  Top 0.152: v3.43,9.02 3.44,9.03 C17.2 | v8.97,11.53 9.78,11.53 10.06,11.81 Q1.3
  Bottom 0.152: v3.43,9.02 3.48,9.02 5.36,10.9 6.04,10.9 U$8.36 6.15,10.95 6.81,10.95 6.83,10.97 7.11,10.97 7.42,11.28 8.97,11.28 v8.97,11.53
VDL  (via drill 0.33, 0.33 pad 0.51)
  Top 0.152: v8.91,10.69 9.32,10.69 9.75,10.26 10.92,10.26 v11.56,10.9 | C18.2 2.79,7.52 v4.88,9.6
  Bottom 0.152: U$8.37 6.06,10.41 | U$8.37 6.15,10.51 Q3.2 8.73,10.51 v8.91,10.69 | v11.56,10.9 11.56,10.05 R12.2 | v4.88,9.6 4.88,9.93 5.33,10.39 5.99,10.39 U$8.37
VGH  (via drill 0.33 pad 0.51)
  Top 0.152: C15.2 3.6,12.04 v4.6,12.04 | Q2.3 12.69,13.44 11.99,13.44 11.46,12.9 11.43,12.9 11.3,12.78 11.25,12.8 7.7,12.8 v7.42,12.52
  Bottom 0.152: v4.6,12.04 4.69,11.95 U$8.34 6.15,11.94 6.81,11.94 6.83,11.96 7.04,11.96 7.42,12.34 v7.42,12.52
VGL  (via drill 0.33 pad 0.51)
  Top 0.152: C16.2 v4.62,11.12 8.69,7.06 10.72,7.06 10.87,6.91 12.8,6.91 13.72,7.82 v13.72,10.79
  Bottom 0.152: U$8.35 6.08,11.43 5.08,11.43 4.78,11.12 v4.62,11.12 | D3.1 11.59,17.59 11.35,17.83 11.35,17.75 11.43,17.68 11.43,17.5 11.81,17.12 11.81,14.07 11.86,14.02 11.86,12.65 v13.72,10.79
VUSB  (via drill 0.33, 0.33 pad 0.51)
  Top 0.152: U$3.6 32.94,8.66 34.14,7.47 v34.14,7.19 34.19,7.34 34.37,7.34 35.59,6.12 v35.59,4.29 | D1.A 39.57,9.02 38.3,9.02 D2.A 38.28,9.09 37.41,9.96 v37.41,10.67 | v35.59,3.12 35.31,3.4 26.72,3.4 D9.A
  Bottom 0.152: v34.14,7.19 33.17,7.19 32,8.36 32,9.53 32.66,10.19 C1.1 32.77,10.26 33.1,10.26 33.12,10.29 33.12,10.72 34.11,11.71 34.57,11.71 34.92,11.35 34.92,11.33 35.56,10.69 36.14,10.69 JP1.VBUS 36.27,10.67 v37.41,10.67 | v35.59,3.12 v35.59,4.29
XIN  (via drill 0.33 pad 0.51)
  Top 0.152: U$1.12 23.84,14.27 v23.6,14.02 | v21.01,9.96 21.48,9.96 C32.2
  Bottom 0.152: v23.6,14.02 23.3,14.02 X1.4 20.86,10.1 v21.01,9.96
XOUT  (via drill 0.33 pad 0.51)
  Top 0.152: U$1.13 24.34,13.76 v24.56,13.54 | v24.08,10.34 24.08,10.33 C31.1
  Bottom 0.152: v24.56,13.54 24.56,12.08 X1.1 24.06,10.36 v24.08,10.34

## Text on the board
tDocu: NOT ROUTED!